# Altium PCB SM3320-BATT-EV.PcbDoc (part 2 of 2)
Units mm, origin at the board's own origin, x right, y up, seen from the top; angles counter-clockwise.
Board outline 204 x 81 mm, 2 copper layers (Top Layer, Bottom Layer), stack 1.662 mm thick; 170 components, 72 nets, 423 pads, 282 vias.
Unrouted connection lines stored in the file: 70.
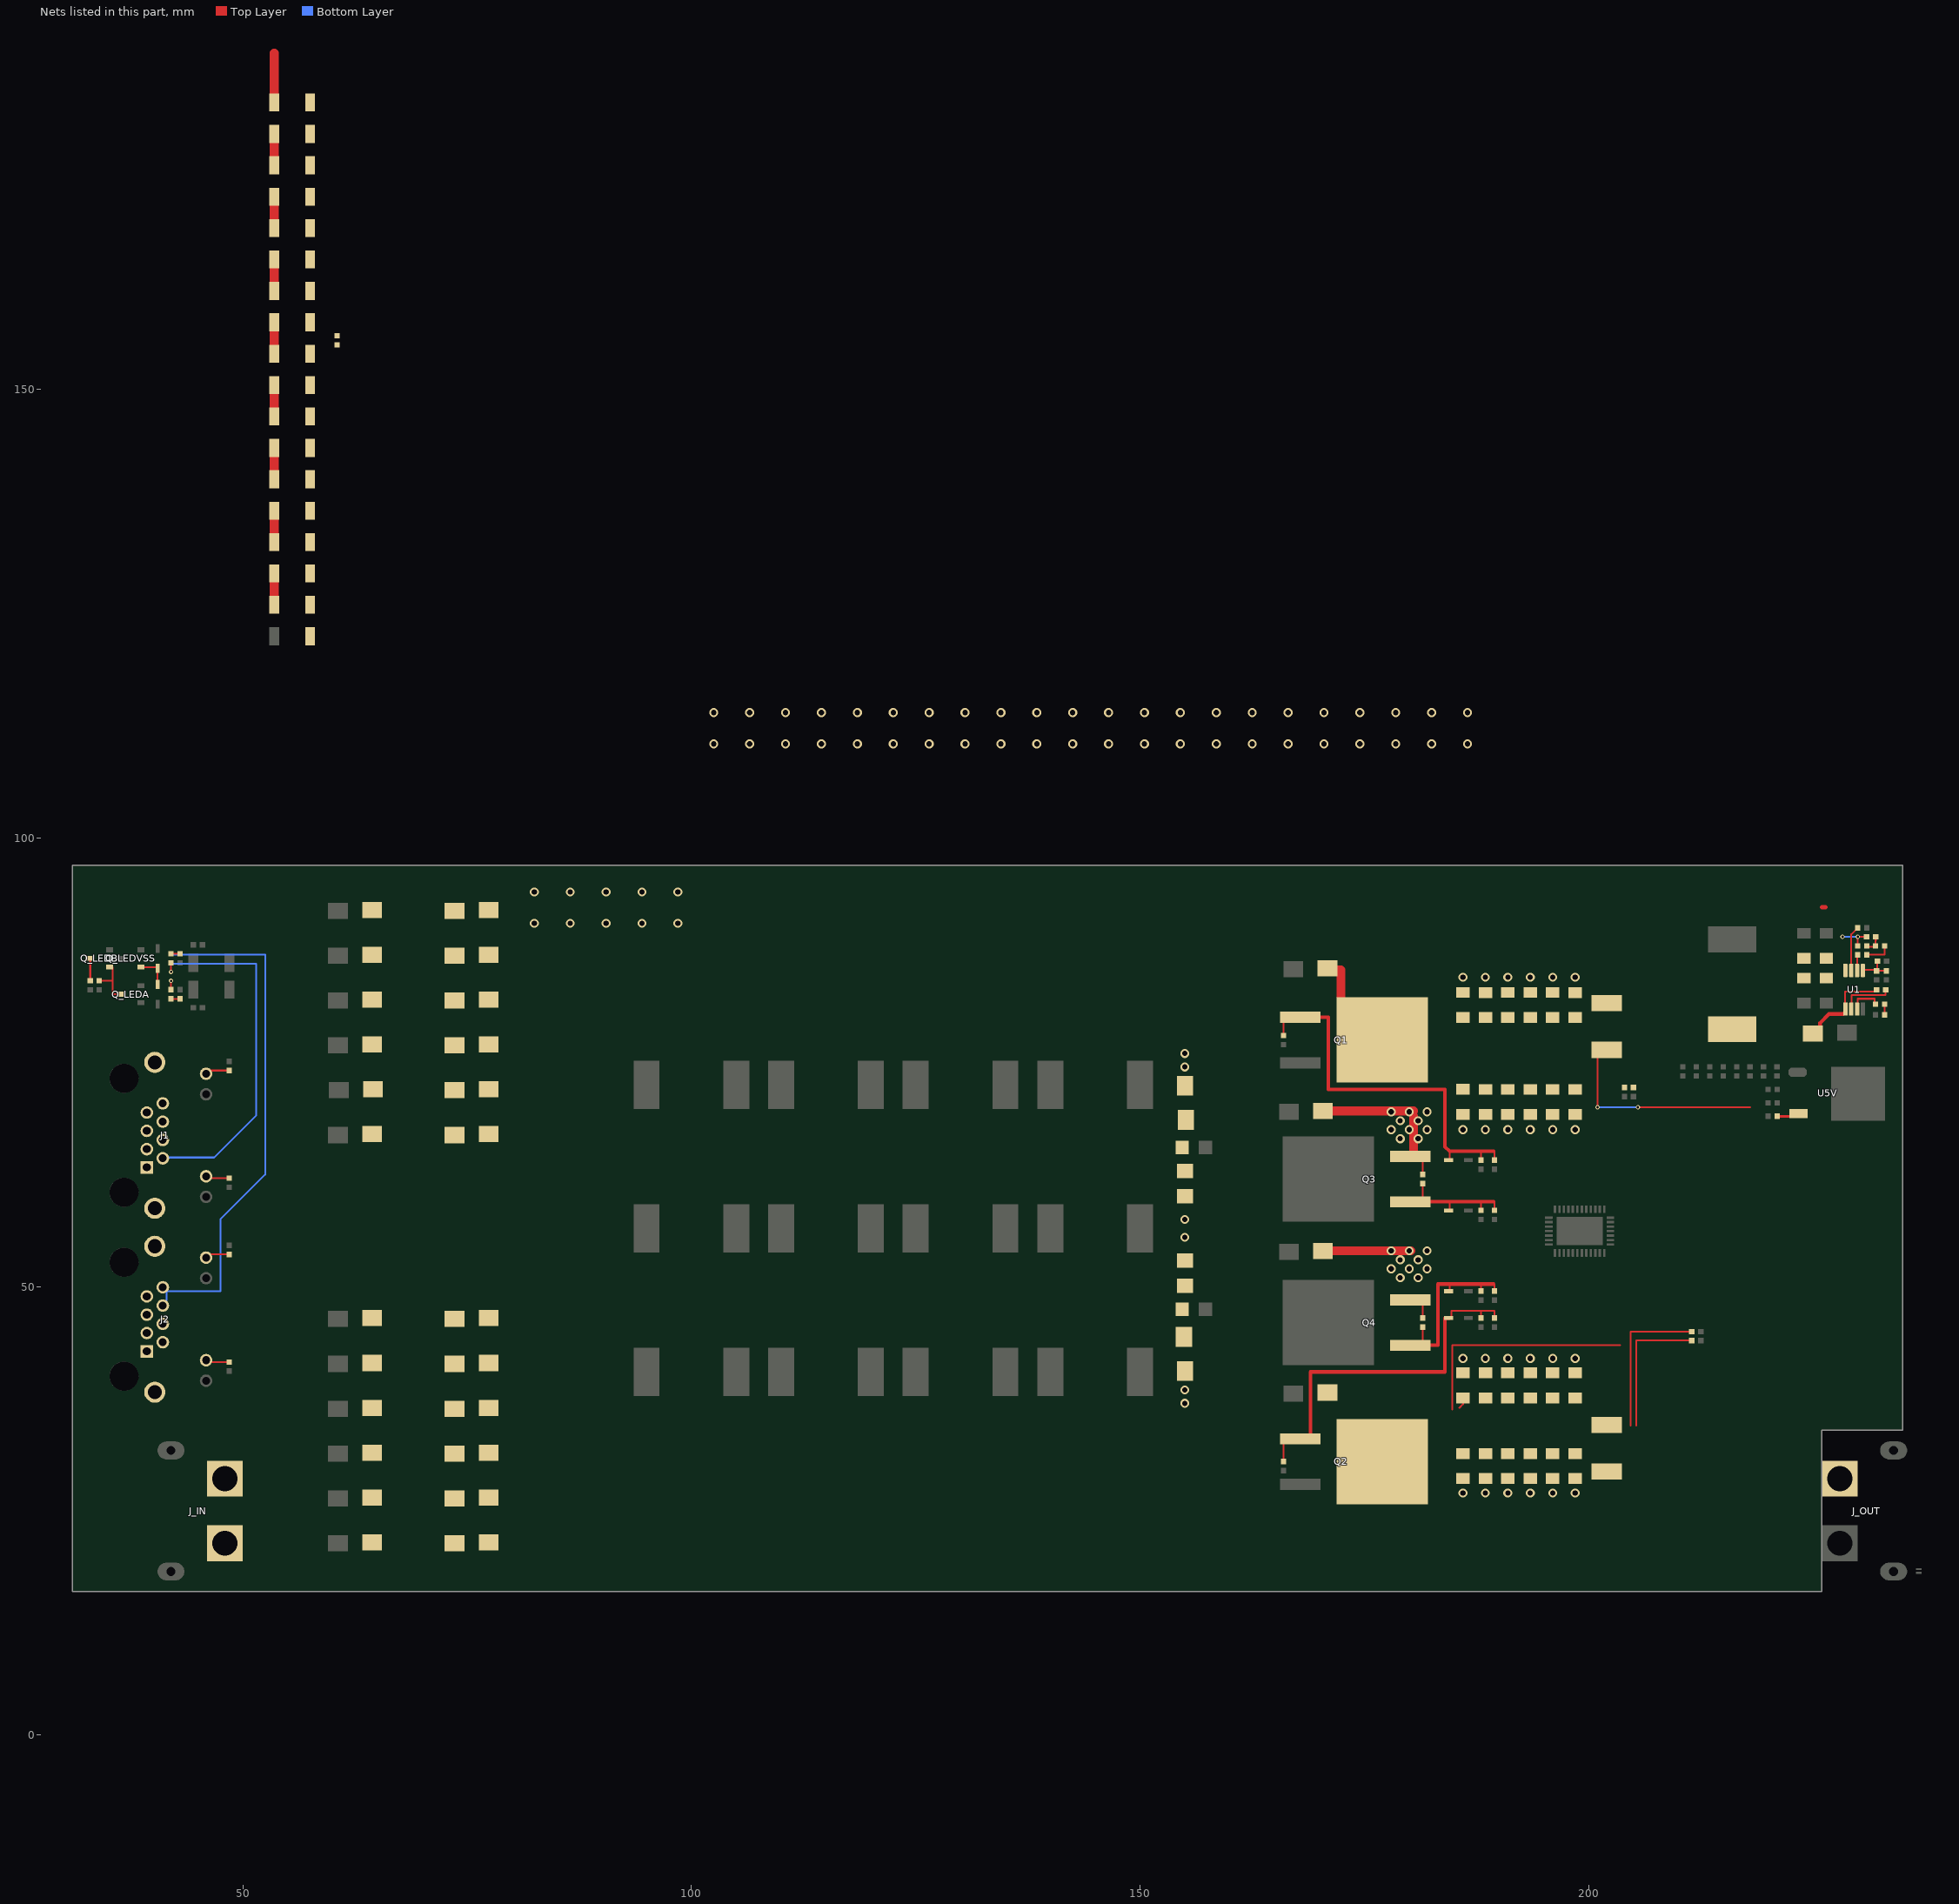
[diagram p2: the nets of this part, all layers, seen from the top]

## Via types
v1: diameter 1, hole 0.6, Top Layer to Bottom Layer, tented both sides, 258 vias
v2: diameter 0.48, hole 0.254, Top Layer to Bottom Layer, tented both sides, 24 vias

## Nets (pads, with @x,y where several pads share a name; then routed paths per layer and width w, separated by ;. In a path a pad name is that pad's centre, name@x,y a point inside that pad or via, vN(x,y) a via of type N, cw(c..) or ccw(c..) an arc to the next point about the centre after c; other vN are vias at no path point) (continued)
NetC15_1: C15.1 U1.7 | length 4.9
  Top Layer w0.2: U1.7@229.275,85.25 229.275,89.275 C15.1@229.9,89.9
NetC17_1: C17.1 U1.2 | length 5.6
  Top Layer w0.2: U1.2@229.3,81.6 229.3,82.5 232.5,82.5 ; 232.908,82.5 232.5,82.5 ; C17.1@233.1,83 233.1,82.5 233.008,82.5 232.5,82.5
NetC17_2: C17.2 D2.1 L0.1 U1.1 | length 9.1
  Top Layer w0.2: U1.1@228.6,80.95 U1.1@228.625,80.95 ; U1.1@228.6,81.4 228.6,82.9 231.792,82.9 C17.2@231.892,83
  Top Layer w0.4: D2.1@225.8,78.6 225.8,79.4 226.8,80.4 228.4,80.4 U1.1@228.5,80.5 ; U1.1@228.6,80.7 U1.1@228.6,80.95
NetC18_1: C18.1 D15.2 R11.2
NetC19_1: C19.1 D14.2 R14.2
NetC24_1: C24.1 R9.2 R15.2 U1.5 | length 3.7
  Top Layer w0.2: U1.5@230.608,85.308 R9.2@232,85.308 ; R9.2@232,85.2 232.008,85.208 R9.2@232.1,85.208 R9.2@232.192,85.208 ; R15.2@232.192,86.3 R9.2@232.192,85.208 ; C24.1@233.2,85.208 R9.2@232.192,85.208
NetD3_2: D3.2 Q1.1 R4.2 R18.2 R18_a.2 | length 46.4
  Top Layer w0.2: R4.2@166,78.008 166,80 Q1.1@166.1,80 ; D3.2@184.5,64.1 184.5,65.1 188,65.1 ; R18_a.2@188,64.108 188,65.1 ; R18.2@189.5,64.108 189.5,65.1 188,65.1
  Top Layer w0.4: Q1.1@167.856,80.04 171,80.04 171,72 184,72 184,65.6 184.5,65.1 188,65.1 189.4,65.1 ; D3.2@184.4,64.1 D3.2@184.5,64.1
NetD4_2: D4.2 Q2.1 R3.1 R19.1 R19_a.1 | length 38.6
  Top Layer w0.2: R3.1@166,30.508 Q2.1@166,32.5 ; D4.2@184.7,46.5 184.7,47.3 188,47.3 ; R19_a.1@188,46.508 188,47.3 ; R19.1@189.5,46.508 189.5,47.3 188,47.3
  Top Layer w0.4: Q2.1@168.5,32.7 Q2.1@168.6,32.7 ; Q2.1@169,32.7 169,40.5 184,40.5 184,46.5 D4.2@184.5,46.5
NetD5_2: D5.2 Q3.1 R22.2 R32.2 R32_a.2 | length 12.7
  Top Layer w0.2: Q3.1@181.5,60 R22.2@181.5,61.492 ; Q3.1@182,59.4 Q3.1@182,59.5 ; D5.2@184.5,58.5 184.5,59.5 ; R32_a.2@188,58.508 188,59.5 ; R32.2@189.5,58.608 189.5,59.5
  Top Layer w0.4: Q3.1@182,59.4 182,59.2 182.3,59.5 184.2,59.5 ; 183.7,59.5 184.5,59.5 188,59.5 189.4,59.5
NetD6_2: D6.2 Q4.1 R23.1 R33.1 R33_a.1 | length 23.7
  Top Layer w0.2: Q4.1@181.5,44 R23.1@181.5,45.492 ; D6.2@184.5,49.5 184.5,50 184.5,50.3 188,50.3 ; R33_a.1@188,49.516 188,50.3 ; R33.1@189.5,49.516 189.5,50.3 188,50.3
  Top Layer w0.4: Q4.1@182.2,43.5 181.8,43.5 183.2,43.5 183.2,50.3 184.5,50.3 188,50.3 189.4,50.3
NetD_CLAMP_1_2: D_CLAMP_1.2 D_CLAMP_2.1 | length 0.5
  Top Layer w0.5: D_CLAMP_2.1@57.5,178 D_CLAMP_2.1@57.5,178.5
NetD_CLAMP_2_2: D_CLAMP_2.2 D_CLAMP_3.1 | length 3.5
  Top Layer w1: D_CLAMP_3.1@53.5,175 D_CLAMP_2.2@53.5,178.5
NetD_CLAMP_3_2: D_CLAMP_3.2 D_CLAMP_4.1 | length 0
NetD_CLAMP_4_2: D_CLAMP_4.2 D_CLAMP_5.1 | length 3.5
  Top Layer w1: D_CLAMP_5.1@53.5,168 D_CLAMP_4.2@53.5,171.5
NetD_CLAMP_5_2: D_CLAMP_5.2 D_CLAMP_6.1
NetD_CLAMP_6_2: D_CLAMP_6.2 D_CLAMP_7.1 | length 3.5
  Top Layer w1: D_CLAMP_7.1@53.5,161 D_CLAMP_6.2@53.5,164.5
NetD_CLAMP_7_2: D_CLAMP_7.2 D_CLAMP_8.1 R16.2
NetD_CLAMP_8_2: D_CLAMP_8.2 D_CLAMP_9.1 | length 4
  Top Layer w0.5: D_CLAMP_8.2@53.5,157.5 D_CLAMP_8.2@53.5,158
  Top Layer w1: D_CLAMP_9.1@53.5,154 D_CLAMP_8.2@53.5,157.5
NetD_CLAMP_9_2: D_CLAMP_9.2 D_CLAMP_10.1 R16.1
NetD_CLAMP_10_2: D_CLAMP_10.2 D_CLAMP_11.1 | length 3
  Top Layer w1: D_CLAMP_11.1@53.5,147 D_CLAMP_10.2@53.5,150
NetD_CLAMP_11_2: D_CLAMP_11.2 D_CLAMP_12.1
NetD_CLAMP_12_2: D_CLAMP_12.2 D_CLAMP_13.1 | length 3.5
  Top Layer w1: D_CLAMP_13.1@53.5,140 D_CLAMP_12.2@53.5,143.5
NetD_CLAMP_13_2: D_CLAMP_13.2 D_CLAMP_14.1
NetD_CLAMP_14_2: D_CLAMP_14.2 D_CLAMP_15.1 | length 3
  Top Layer w1: D_CLAMP_15.1@53.5,133 D_CLAMP_14.2@53.5,136
NetD_CLAMP_15_2: D_CLAMP_15.2 D_CLAMP_16.1
NetD_CLAMP_16_2: D_CLAMP_16.2 D_CLAMP_17.1 | length 3
  Top Layer w1: D_CLAMP_17.1@53.5,126 D_CLAMP_16.2@53.5,129
NetD_CLAMP_17_2: D_CLAMP_17.2 D_CLAMP_18.1
NetJ1_10: J1.10 R101.2 | length 2.5
  Top Layer w0.2: J1.10@46,62.1 R101.2@48.5,62.1
NetJ1_12: J1.12 R100.2 | length 2.5
  Top Layer w0.2: J1.12@46,74.1 R100.2@48.5,74.1
NetJ1_S1: J1.S1 J1.S2
NetJ2_10: J2.10 R102.2 | length 2.5
  Top Layer w0.2: J2.10@46,41.6 R102.2@48.5,41.6
NetJ2_12: J2.12 R103.2 | length 2.5
  Top Layer w0.2: J2.12@46,53.6 R103.2@48.5,53.6
NetJ2_S1: J2.S1 J2.S2
NetQ_LEDA_3: Q_LEDA.3 Q_LEDB.1 R_LEDB_O.1 | length 5.8
  Top Layer w0.2: R_LEDB_O.1@34,84.1 35.5,84.1 ; Q_LEDB.1@35,85.6 35.5,85.6 35.5,84.1 ; Q_LEDA.3@36.35,82.6 35.5,82.6 35.5,84.1
NetQ_LEDB_3: Q_LEDB.3 R_LEDA_O.1 | length 2.5
  Top Layer w0.2: R_LEDA_O.1@33,84.108 Q_LEDB.3@33,86.6
NetR5_1: R5.1 R5_a.2 | length 1.5
  Top Layer w0.2: R5_a.2@233,80.1 232.908,80.1 R5_a.2@233.008,80.3 R5.1@233.008,81.5
NetR5_2: R5.2 U1.3 | length 3.3
  Top Layer w0.2: U1.3@230,81.3 230,82.1 231.892,82.1 231.892,81.5 R5.2@231.9,81.5
NetR17_1: R17.1 U5V.3 | length 2.5
  Top Layer w0.3: R17.1@221.008,69 U5V.3@223.5,69
NetR_1A_a_2: R_1A_a.2 R_1A_b.1 | length 1
  Top Layer w0.2: R_1A_a.2@42,82.1 42.008,82.092 R_1A_b.1@43,82.092
NetR_1B_a_2: R_1B_a.2 R_1B_b.1 | length 1.1
  Top Layer w0.2: R_1B_a.2@42,87.108 R_1B_b.1@43,87.108 43.092,87.108 R_1B_b.1@43.1,87.1
NetRon_a_1: Ron_a.1 Ron_b.1 | length 3
  Top Layer w0.2: Ron_a.1@230.9,86.9 Ron_a.1@230.908,86.892 ; Ron_a.1@230.908,86.9 Ron_a.1@231.008,87 233,87 233,87.8 Ron_b.1@233.1,87.8
NetRon_a_2: Ron_a.2 U1.6 | length 1.7
  Top Layer w0.2: U1.6@229.925,85.15 Ron_a.2@229.925,86.825
NetRon_b_2: Ron_b.2 Ron_c.2 Ron_d.2 | length 2.2
  Top Layer w0.2: Ron_c.2@230.808,87.9 230.908,87.9 Ron_b.2@232,87.9 ; Ron_b.2@231.992,88 Ron_d.2@232,89
PAN_DET: D_1A.1 D_1B.1 Q_LEDVSS.1 | length 3.8
  Top Layer w0.2: Q_LEDVSS.1@38.65,85.65 38.65,85.6 D_1B.1@40.5,85.6 ; D_1A.1@40.5,83.6 D_1A.1@40.5,83.7 D_1B.1@40.5,85.5
PGND: C1.1 C4.1 C5.1 C6.1 C7.1 C8.1 C9.1 C10.1 C11.1 C12.1 C13.1 C16.1 C20.1 C25.1 C27.1 C28.1 C30.1 C36.1 C41.1 C44.1 C45.1 C47.1 C70.1 C72.1 D9.2 D12.2 D14.1 D15.1 Q3.3 Q4.3 R11.1 R14.1 R22.1 R23.2 | length 26.9
  Top Layer w0.2: Q4.3@181.4,48.4 Q4.3@181.4,48.508 ; R23.2@181.5,46.508 Q4.3@181.5,48.5 ; R22.1@181.5,62.508 Q3.3@181.5,64
  Top Layer w1: D9.2@170.4,54 v1(178,54) v1(180,54) v1@180.2,54 ; 171.5,69.6 180.5,69.6 ; Q3.3@180.5,64.5 180.5,69
  other v1: 186,27 188.5,27 191,27 193.5,27 196,27 198.5,27 155,37 155,38.5 186,42 188.5,42 191,42 193.5,42 196,42 198.5,42 179,51 181,51 178,52 180,52 182,52 179,53 181,53 182,54 155,55.5 155,57.5 179,66.5 181,66.5 178,67.5 180,67.5 182,67.5 186,67.5 188.5,67.5 191,67.5 193.5,67.5 196,67.5 198.5,67.5 179,68.5 181,68.5 178,69.5 180,69.5 182,69.5 155,74.5 155,76 186,84.5 188.5,84.5 191,84.5 193.5,84.5 196,84.5 198.5,84.5
SOL_1A: D1_a.2 D1_b.2 D1_c.2 D1_d.2 D1_e.2 D1_f.2 D3_a.1 D3_b.1 D3_c.1 D3_d.1 D3_e.1 D3_f.1 J1.1 J1.2 J1.3 J1.4 J1.5 J1.6 J1.7 J1.8 J_IN.PLUS R_1A_a.1 | length 39.4
  Top Layer w0.2: R_1A_a.1@42,83.116 v2(42,84.1)
  Bottom Layer w0.2: J1.2@41.4,64.4 46.8,64.4 51.5,69.1 51.5,86 42,86
SOL_1B: D2_a.2 D2_b.2 D2_c.2 D2_d.2 D2_e.2 D2_f.2 D4_a.1 D4_b.1 D4_c.1 D4_d.1 D4_e.1 D4_f.1 J2.1 J2.2 J2.3 J2.4 J2.5 J2.6 J2.7 J2.8 J_IN.MINUS R_1B_a.1 | length 58.1
  Top Layer w0.2: v2(42,85.1) R_1B_a.1@42,86.092 R_1B_a.1@42,86.1
  Bottom Layer w0.2: 41.5,48.5 41.5,49.5 47.5,49.5 47.5,57.5 52.5,62.5 52.5,87 42,87
VIN_N: C4.2 C5.2 C6.2 C7.2 C8.2 C9.2 C10.2 C11.2 C12.2 C13.2 C70.2 C72.2 D13.1 Q1.2 R1.1 RB1_P.1 | length 27
  Top Layer w0.2: v2(201,70) 201,75.5 ; v2(205.5,70) 218,70
  Top Layer w1: D13.1@170.9,85.5 171.1,85.3 172.4,85.3 172.4,82.4
  Bottom Layer w0.2: v2(201,70) v2(205.5,70)
VIN_P: C21.2 C22.2 C26.2 C64.2 D1_a.1 D1_b.1 D1_c.1 D1_d.1 D1_e.1 D1_f.1 D2_a.1 D2_b.1 D2_c.1 D2_d.1 D2_e.1 D2_f.1 D_CLAMP_1.1 R1.2 RB1_N.1 Ron_c.1 Ron_d.1 U1.8 | length 10
  Top Layer w0.2: Ron_c.1@229.892,88 229.943,88.05 229.99,88.095 229.994,88.5 v2(230,89) 231.091,89 Ron_d.1@231.091,88.9 ; Ron_d.1@231.091,88.8 Ron_d.1@231.093,88.999
  Top Layer w0.5: 226,92.3 226.4,92.3
  Top Layer w1: D_CLAMP_1.1@53.5,182 53.5,187.5
  Bottom Layer w0.2: v2(228.3,89) v2(230,89)
  other v1: 82.5,90.5 86.5,90.5 90.5,90.5 94.5,90.5 98.5,90.5 82.5,94 86.5,94 90.5,94 94.5,94 98.5,94 102.5,110.5 106.5,110.5 110.5,110.5 114.5,110.5 118.5,110.5 122.5,110.5 126.5,110.5 130.5,110.5 134.5,110.5 138.5,110.5 142.5,110.5 146.5,110.5 150.5,110.5 154.5,110.5 158.5,110.5 162.5,110.5 166.5,110.5 170.5,110.5 174.5,110.5 178.5,110.5 182.5,110.5 186.5,110.5 102.5,114 106.5,114 110.5,114 114.5,114 118.5,114 122.5,114 126.5,114 130.5,114 134.5,114 138.5,114 142.5,114 146.5,114 150.5,114 154.5,114 158.5,114 162.5,114 166.5,114 170.5,114 174.5,114 178.5,114 182.5,114 186.5,114
VOUT_N: J_OUT.PLUS R10.2 RA1_N.1 | length 15.7
  Top Layer w0.2: 205.3,34.5 205.3,44 RA1_N.1@211.492,44 RA1_N.1@211.5,44
VOUT_P: C1.2 C16.2 C20.2 C25.2 C27.2 C28.2 C30.2 C36.2 C41.2 C44.2 C45.2 C47.2 D7.1 Q2.2 R10.1 RA1_P.1 | length 44.9
  Top Layer w0.2: 184.8,36.3 184.8,43.5 203.5,43.5 ; 185.6,36.5 186,36.9 C47.2@186,38.005 ; 204.7,34.5 204.7,45 RA1_P.1@211.492,45
pads on no net: J1. J2. J_IN.M J_OUT.M U.1 U.2 U.3 U.4 U.5 U.6 U.7 U.8 U.9 U.10 U.11 U.12 U.13 U.14 U.15 U.16 U.17 U.18 U.19 U.20 U.21 U.22 U.23 U.24 U.25 U.26 U.27 U.28 U.29 U.30 U.31 U.32 U.33 U.34 U.35 U.36 U.37 U.38 U.39
copper on no net: | length 1.8
  Bottom Layer w0.5: 183.4,54.2 185.1,54.2 185.2,54.1
  other v1: 193.5,18 196.5,18 199.5,18 192,19 195,19 198,19 201,19 193.5,20 196.5,20 199.5,20 192,21 195,21 198,21 201,21 193.5,22 196.5,22 199.5,22 192,23 195,23 198,23 201,23 193.5,24 196.5,24 199.5,24 81,124.5 84.5,124.5 81,128 84.5,128 81,131.5 84.5,131.5 81,135 84.5,135 81,139 84.5,139 81,143 84.5,143 81,147 84.5,147 81,150.5 84.5,150.5 81,154 84.5,154

## Polygon pours and split planes (outlines as drawn)
GND on Bottom Layer "Bottom Layer-GND" (solid, pour order 1242): 183.5,66 239.5,66 239.5,43.5 183.5,43.5
GND on Bottom Layer "Bottom Layer-GND 1" (solid, pour order 1246): 239.5,64.5 239.5,96 200,96 200,64.5
no net on Bottom Layer "Bottom Layer-No Net 23" (solid, pour order 1146): 142.432,26.805 156.021,26.805 156.021,50.91 142.483,50.91 142.432,50.96

## Other copper
Top Layer:
  region net VOUT_P: 203.7,33.5 203.7,35.5 198,35.5 198,33.5
  region net VIN_N: 203.7,75.5 203.7,77.5 198,77.5 198,75.5
  rectangle net VIN_N: 174,73 199,79
  region net HS_A: 107,81 100.5,81 100.5,37.5 107,37.5
  region net HS_B: 99.5,75.5 93,75.5 93,32 99.5,32
  region net PGND: 155.5,76 154.5,76 154.5,72 155.5,72
  rectangle net PGND: 154.5,37 155.5,41
  rectangle net NetC19_1: 154.5,43.5 155.5,50.5
  rectangle net NetC18_1: 154.5,62.5 155.5,69.5
  rectangle net PGND: 154.5,53 155.5,60
  region net HS_A: 152.5,81 146,81 146,37.5 152.5,37.5
  rectangle net HS_B: 138.5,32 145,75.5
  rectangle net HS_B: 123.5,32 130,75.5
  region net HS_A: 122,80.5 115.5,80.5 115.5,37.5 122,37.5
  region net HS_B: 114.5,75.5 108,75.5 108,32 114.5,32
  region net HS_A: 137.5,81 131,81 131,37.5 137.5,37.5
  rectangle net NetD_CLAMP_1_2: 58.5,177.5 62.5,183
  rectangle net NetD_CLAMP_3_2: 58.5,170.5 62.5,176
  rectangle net NetD_CLAMP_5_2: 58.5,163.5 62.5,169
  rectangle net NetD_CLAMP_7_2: 58.5,156.5 62.5,162
  rectangle net NetD_CLAMP_9_2: 58.5,149.5 62.5,155
  rectangle net NetD_CLAMP_11_2: 58.5,142.5 62.5,148
  rectangle net NetD_CLAMP_13_2: 58.5,135.5 62.5,141
  rectangle net NetD_CLAMP_15_2: 58.5,128.5 62.5,134
  rectangle net NetD_CLAMP_17_2: 58.5,121.5 62.5,127
  rectangle net HS_B: 79,17 167.5,25.5
  rectangle net SOL_1B: 38.5,42.1 42,50.6
  rectangle net SOL_1B: 38.5,43.5 53,49
  rectangle net SOL_1B: 50,43.5 55,56
  rectangle net SOL_1B: 50,49 72,56
  rectangle net GND_IN: 56,65.3 59,93.7
  rectangle net GND_IN: 56,19.8 59,48.2
  rectangle net SOL_1A: 50,57.5 55,69.5
  rectangle net SOL_1A: 50,57.5 72,64.5
  region: 191,-4.5 191,2.5 126.5,2.5 126.5,-4.5
  region net HS_A: 181,6.1 181,13 121,13 121,6.1
  rectangle net VIN_N: 171.9,81.5 182,86.4
  rectangle net VIN_P: 227.9,84.5 228.8,92.7
  region net GND: 226,82 222,82 222,81 226,81
  region net GND: 227,89 227,91 226,91 226,89
  region net GND: 224.5,89 224.5,91 223.5,91 223.5,89
  region net VIN_P: 228.5,85.8 224,85.8 224,85.2 228.5,85.2
  region net VIN_P: 227,84.5 227,86.5 226,86.5 226,84.5
  region net VIN_P: 224.5,84.5 224.5,86.5 223.5,86.5 223.5,84.5
  rectangle net GND: 227,72 233,79.5
  region net VIN_P: 228.8,96 210,96 210,92 228.8,92
  rectangle net VIN_P: 200.5,81 203.5,96
  region net PGND: 199,85.5 185.5,85.5 185.5,84 199,84
  rectangle net PGND: 185.5,66.5 199,68
  region net PGND: 199,26 199,27.5 185.5,27.5 185.5,26
  rectangle net GND: 229.4,77.4 233,79.5
  rectangle net 10VDC: 210,76.5 212.7,90.4
  region net NetC17_2: 226.1,77.4 226.1,80 214.3,80 214.3,77.4
  rectangle net 10VDC: 210,86.5 222.5,90.5
  rectangle net GND: 230.4,77.4 231.4,81.7
  region net 10VDC: 223,75.5 223,76.8 210,76.8 210,75.5
  rectangle net PGND: 169.3,68.1 182.5,70.1
  rectangle net PGND: 177.3,63 182.5,70
  rectangle net PGND: 169.3,52.5 182,54.5
  rectangle net PGND: 177.3,47 182.5,54.5
  rectangle net VOUT_P: 171.9,34 182,39.1
  rectangle net VOUT_N: 210.5,25 230.5,32
  rectangle net NetD_CLAMP_1_2: 57.5,178 59,179
  rectangle net NetD_CLAMP_1_2: 57.5,181.5 59,182.5
  rectangle net NetD_CLAMP_3_2: 57.5,171 59,172
  rectangle net NetD_CLAMP_3_2: 57.5,174.5 59,175.5
  rectangle net NetD_CLAMP_5_2: 57.5,164 59,165
  rectangle net NetD_CLAMP_5_2: 57.5,167.5 59,168.5
  rectangle net NetD_CLAMP_7_2: 57.5,157 59,158
  rectangle net NetD_CLAMP_7_2: 57.5,160.5 59,161.5
  rectangle net NetD_CLAMP_9_2: 57.5,150 59,151
  rectangle net NetD_CLAMP_9_2: 57.5,153.5 59,154.5
  rectangle net NetD_CLAMP_11_2: 57.5,143 59,144
  rectangle net NetD_CLAMP_11_2: 57.5,146.5 59,147.5
  rectangle net NetD_CLAMP_13_2: 57.5,136 59,137
  rectangle net NetD_CLAMP_13_2: 57.5,139.5 59,140.5
  rectangle net NetD_CLAMP_15_2: 57.5,129 59,130
  rectangle net NetD_CLAMP_15_2: 57.5,132.5 59,133.5
  rectangle net NetD_CLAMP_17_2: 57.5,125.5 59,126.5
  rectangle net NetD_CLAMP_17_2: 57.5,122 59,123
  rectangle net HS_B: 157,27 165,56
  rectangle net SOL_1A: 39.5,64 55,69.5
  rectangle net SOL_1A: 38.5,62.6 42,71.1
  region net SOL_1B: 73.5,21 73.5,22 71.5,22 71.5,21
  region net VIN_P: 79.5,21 79.5,22 77.5,22 77.5,21
  region net VIN_P: 78,92.5 78,91.5 80,91.5 80,92.5
  region net SOL_1A: 71,92.5 71,91.5 73,91.5 73,92.5
  region net SOL_1A: 66.5,91.5 66.5,92.5 64.5,92.5 64.5,91.5
  region net SOL_1B: 65,22 65,21 67,21 67,22
  region net GND_IN: 60,91.5 60,92.5 58,92.5 58,91.5
  region net GND_IN: 58.5,22 58.5,21 60.5,21 60.5,22
  region net SOL_1B: 72,20 72,56 66,56 66,20
  region net GND_IN: 148.5,-14 148.5,-6.5 121,-6.5 121,-14
  region net GND_IN: 58.5,27 58.5,26 60.5,26 60.5,27
  region net GND_IN: 58.5,32 58.5,31 60.5,31 60.5,32
  region net GND_IN: 58.5,37 58.5,36 60.5,36 60.5,37
  region net GND_IN: 58.5,42 58.5,41 60.5,41 60.5,42
  region net GND_IN: 58.5,47 58.5,46 60.5,46 60.5,47
  region net SOL_1A: 67,81.5 67,82.5 65,82.5 65,81.5
  region net SOL_1A: 67,86.5 67,87.5 65,87.5 65,86.5
  region net GND_IN: 60,86.5 60,87.5 58,87.5 58,86.5
  region net GND_IN: 60,81.5 60,82.5 58,82.5 58,81.5
  region net GND_IN: 60,76.5 60,77.5 58,77.5 58,76.5
  region net GND_IN: 60,66.5 60,67.5 58,67.5 58,66.5
  region net GND_IN: 60,71.5 60,72.5 58,72.5 58,71.5
  region net SOL_1A: 67,76.5 67,77.5 65,77.5 65,76.5
  region net SOL_1A: 67,71.5 67,72.5 65,72.5 65,71.5
  region net SOL_1A: 67,66.5 67,67.5 65,67.5 65,66.5
  region net SOL_1A: 71,87.5 71,86.5 73,86.5 73,87.5
  region net SOL_1A: 71,82.5 71,81.5 73,81.5 73,82.5
  region net SOL_1A: 71,77.5 71,76.5 73,76.5 73,77.5
  region net SOL_1A: 71,72.5 71,71.5 73,71.5 73,72.5
  region net SOL_1A: 71,67.5 71,66.5 73,66.5 73,67.5
  region net VIN_P: 78,67.5 78,66.5 80,66.5 80,67.5
  region net VIN_P: 78,72.5 78,71.5 80,71.5 80,72.5
  region net VIN_P: 78,77.5 78,76.5 80,76.5 80,77.5
  region net VIN_P: 78,82.5 78,81.5 80,81.5 80,82.5
  region net VIN_P: 78,87.5 78,86.5 80,86.5 80,87.5
  region net VIN_P: 80,26 80,27 78,27 78,26
  region net SOL_1B: 73,26 73,27 71,27 71,26
  region net SOL_1B: 73,36 73,37 71,37 71,36
  region net SOL_1B: 73,31 73,32 71,32 71,31
  region net VIN_P: 80,31 80,32 78,32 78,31
  region net VIN_P: 80,36 80,37 78,37 78,36
  region net VIN_P: 80,41 80,42 78,42 78,41
  region net VIN_P: 80,46 80,47 78,47 78,46
  region net SOL_1B: 73,41 73,42 71,42 71,41
  region net SOL_1B: 73,46 73,47 71,47 71,46
  region net SOL_1B: 65,47 65,46 67,46 67,47
  region net SOL_1B: 65,42 65,41 67,41 67,42
  region net SOL_1B: 65,37 65,36 67,36 67,37
  region net SOL_1B: 65,32 65,31 67,31 67,32
  region net SOL_1B: 65,27 65,26 67,26 67,27
  rectangle net SOL_1A: 66,57.5 72,93
  region net GND_IN: 119,-2.5 119,3.5 56,3.5 56,-2.5
  rectangle net VIN_P: 79,20 86.5,96
  rectangle net PGND: 185.5,82.6 186.5,84.6
  region net PGND: 199,69.4 198,69.4 198,67.4 199,67.4
  rectangle net PGND: 198,82.6 199,84.6
  rectangle net PGND: 195.5,82.6 196.5,84.6
  rectangle net PGND: 193,82.6 194,84.6
  rectangle net PGND: 190.5,82.6 191.5,84.6
  rectangle net PGND: 188,82.6 189,84.6
  region net PGND: 191.5,69.4 190.5,69.4 190.5,67.4 191.5,67.4
  region net PGND: 194,69.4 193,69.4 193,67.4 194,67.4
  region net PGND: 196.5,69.4 195.5,69.4 195.5,67.4 196.5,67.4
  region net PGND: 189,69.4 188,69.4 188,67.4 189,67.4
  region net PGND: 186.5,69.4 185.5,69.4 185.5,67.4 186.5,67.4
  region net VIN_N: 199,80.1 198,80.1 198,78.1 199,78.1
  region net VIN_N: 196.5,80.1 195.5,80.1 195.5,78.1 196.5,78.1
  region net VIN_N: 194,80.1 193,80.1 193,78.1 194,78.1
  rectangle net VIN_N: 185.5,71.9 186.5,73.9
  rectangle net VIN_N: 188,71.9 189,73.9
  rectangle net VIN_N: 190.5,71.9 191.5,73.9
  rectangle net VIN_N: 193,71.9 194,73.9
  rectangle net VIN_N: 195.5,71.9 196.5,73.9
  rectangle net VIN_N: 198,71.9 199,73.9
  region net VIN_N: 186.5,80.1 185.5,80.1 185.5,78.1 186.5,78.1
  region net VIN_N: 189,80.1 188,80.1 188,78.1 189,78.1
  region net VIN_N: 191.5,80.1 190.5,80.1 190.5,78.1 191.5,78.1
  region net PGND: 191.5,28.8 190.5,28.8 190.5,26.8 191.5,26.8
  region net PGND: 189,28.8 188,28.8 188,26.8 189,26.8
  region net PGND: 186.5,28.8 185.5,28.8 185.5,26.8 186.5,26.8
  rectangle net PGND: 198,40.2 199,42.2
  rectangle net PGND: 195.5,40.2 196.5,42.2
  rectangle net PGND: 193,40.2 194,42.2
  rectangle net PGND: 190.5,40.2 191.5,42.2
  rectangle net PGND: 188,40.2 189,42.2
  rectangle net PGND: 185.5,40.2 186.5,42.2
  region net PGND: 194,28.8 193,28.8 193,26.8 194,26.8
  region net PGND: 196.5,28.8 195.5,28.8 195.5,26.8 196.5,26.8
  region net PGND: 199,28.8 198,28.8 198,26.8 199,26.8
  region net VOUT_P: 194,33.1 193,33.1 193,31.1 194,31.1
  region net VOUT_P: 191.5,33.1 190.5,33.1 190.5,31.1 191.5,31.1
  region net VOUT_P: 189,33.1 188,33.1 188,31.1 189,31.1
  region net VOUT_P: 186.5,33.1 185.5,33.1 185.5,31.1 186.5,31.1
  rectangle net VOUT_P: 185.5,35.9 186.5,37.9
  rectangle net VOUT_P: 188,35.9 189,37.9
  rectangle net VOUT_P: 190.5,35.9 191.5,37.9
  rectangle net VOUT_P: 193,35.9 194,37.9
  rectangle net VOUT_P: 195.5,35.9 196.5,37.9
  rectangle net VOUT_P: 198,35.9 199,37.9
  region net VOUT_P: 199,33.1 198,33.1 198,31.1 199,31.1
  region net VOUT_P: 196.5,33.1 195.5,33.1 195.5,31.1 196.5,31.1
  rectangle net PGND: 185.5,41.4 199,43
  rectangle net VOUT_P: 174,32.5 199,36.5
  rectangle net HS_A: 157,57.5 165,85
  rectangle net HS_A: 157,57.5 176.2,66.7
  rectangle net VIN_N: 171.9,82.5 182,86.5
  region net VIN_P: 79,96 79,87.5 203.5,87.5 203.5,96
  rectangle net HS_B: 159.5,41.3 176.2,50.8
  region net HS_B: 165,27.5 165,36 93,36 93,27.5
  region net HS_A: 165,77 165,85.5 100.5,85.5 100.5,77
  pour cut-out: 209,28 202,28 202,48 212,48 212,42.5 209,42.5
Bottom Layer:
  rectangle net SOL_1A: 38.5,62.6 42,71.1
  rectangle net GND_OUT: 217,17 230.5,24
  region: 202,25.5 79,25.5 79,17 202,17
  rectangle net PGND: 181,26.5 202,43
  rectangle net VIN_P: 79,88.5 189,96
  rectangle net SOL_1B: 38.5,42.1 42,50.6
  region net PGND: 199,66.5 199,85.5 177,85.5 177,66.5
  region net PGND: 188.8,85.5 79,85.5 79,26.5 188.8,26.5

## Silkscreen, mask and mechanical layers (free items; w line width, h text height)
Top Overlay:
  text "B" at 111.5,126.5 h9
  text "JLCJLCJLCJLC" at 206.6,47.2 h1 r90
Bottom Overlay:
  text "b" at 213.634,97 h70 r90
  text "GND" at 222.1,46.1 h0.8
  text "GND" at 229.7,46.1 h0.8
  text "SDA" at 222.1,43.6 h0.8
  text "SDA" at 229.7,43.6 h0.8
  text "SCL" at 222.1,41 h0.8
  text "SCL" at 229.7,41 h0.8
  text "+3V3" at 229.7,38.6 h0.8
  text "+5V" at 222,38.5 h0.8
  text "DC+" at 215,27 h2
  text "PV_A" at 63.7,26.9 h2
  text "DC-" at 215,20 h2
  text "PV_B" at 63.6,19.7 h2
Mechanical 9:
  drawing of 61 lines, arcs and shapes, not listed
  text "1" at 21.37,152.273 h1.12
  text "2" at 84.76,152.273 h1.12
  text "3" at 147.989,152.273 h1.12
  text "4" at 211.658,152.273 h1.12
  text "5" at 275.133,152.273 h1.12
  text "6" at 338.76,152.273 h1.12
  text "A" at -8.001,123.241 h1.12
  text "A" at 367.919,123.241 h1.12
  text "B" at 367.919,62.789 h1.12
  text "C" at 367.919,2.464 h1.12
  text "PROJECT TITLE:" at 290.703,-52.451 h1.12
  text ".PRJ_Title" at 291.973,-55.499 h1.12
  text "D" at -8.001,-57.734 h1.12
  text "D" at 367.919,-57.734 h1.12
  text "REV:" at 252.857,-59.817 h1.12
  text "PRINT DATE:" at 274.142,-59.817 h1.12
  text "DESIGNED FOR:" at 290.703,-59.817 h1.12
  text ".PCB_MinorRev" at 253.492,-63.754 h1.12
  text ".Print_Date" at 274.193,-63.754 h1.12
  text ".PRJ_Customer" at 291.973,-63.754 h1.12
  text "PADC NUMBER:" at 290.703,-67.691 h1.12
  text "FAB DRAWING NUMBER:" at 329.946,-67.691 h1.12
  text "National Semiconductor and/or its licensors do not warrant the accuracy or completeness of this" at 132.461,-67.742 h1.12
  text "specification or any information contained therein. National and/or its licensors do not warrant that" at 132.461,-70.094 h1.12
  text ".print_Scale" at 253.492,-70.485 h1.12
  text ".PRJ_PADC" at 291.973,-71.247 h1.12
  text "551" at 331.216,-71.247 h1.12
  text ".PRJ_BasePN" at 336.169,-71.247 h1.12
  text "this design will meet the specifications, will be suitable for your application or fit for any particular" at 132.461,-72.446 h1.12
  text "purpose, or will operate in an implementation. National and/or its licensors do not warrant that the" at 132.461,-74.798 h1.12
  text "FILE NAME:" at 252.857,-75.311 h1.12
  text "ALTIUM DESIGNER VERSION:" at 329.946,-75.311 h1.12
  text "design is production worthy. You should completely validate and test your design implementation" at 132.461,-77.15 h1.12
  text ".Pcb_File_Name_No_Path" at 253.492,-78.698 h1.12
  text ".Application_BuildNumber" at 331.216,-79.29 h1.12
  text "to confirm the system functionality for your application." at 132.461,-79.502 h1.12
  text "1" at 21.37,-83.947 h1.12
  text "2" at 84.76,-83.947 h1.12
  text "3" at 147.989,-83.947 h1.12
  text "4" at 211.658,-83.947 h1.12
  text "5" at 275.133,-83.947 h1.12
  text "6" at 338.76,-83.947 h1.12
Mechanical 10:
  drawing of 203 lines, arcs and shapes, not listed
  text "Update the notes below per your unique requirements." at 476.555,121.615 h1.12
  text "In most cases, you should be able to delete or modify lines." at 476.301,117.043 h1.12
  text "NOTES:  UNLESS OTHERWISE SPECIFIED" at 476.682,109.296 h1.12
  text "1. MATERIAL: PER IPC-4101/24" at 476.682,106.102 h1.12
  text "1A. LAMINATE: TYPE GFN, GRADE A, CLASS 2, AND TYPE FR-4" at 476.682,103.501 h1.12
  text "DESIGN INFORMATION" at 317.373,100.863 h1.52
  text "1A. LAMINATE: HIGH-TEMPERATURE FR4" at 478.333,99.715 h1.12
  text "1B. COPPER LAYERS: .0028 +/-.0005 INCH OUTER.   .0028 +/-.0005 INCH INNER LAYERS." at 478.46,97.114 h1.12
  text "(REFER ALSO ARRAY/PANEL PROFILING INFORMATION)" at 308.19,96.756 h1.52
  text "BOARD SIZE" at 290.765,96.647 h1.52
  text "3450MIL" at 302.508,93.4 h1.52
  text "X" at 315.353,93.4 h1.52
  text "5000MIL" at 321.228,93.4 h1.52
  text "1C. ALL COPPER LAYERS MUST BE SPACED PER DETAIL \"A\"." at 478.46,93.328 h1.12
  text "1D. BOARD THICKNESS IS MEASURED INCLUDING TOP AND BOTTOM SIDES FINISHED COPPER. ANY TIN," at 478.587,90.727 h1.12
  text "Number of Layers :" at 301.002,88.392 h1.52
  text "6" at 328.81,88.138 h1.52
  text "TIN/LEAD OR GOLD PLATING, SOLDERMASK AND SILKSCREEN LEGEND MUST NOT BE INCLUDED IN" at 484.556,87.533 h1.12
  text "MIN. TRACK WIDTH:" at 301.002,84.861 h1.52
  text "8" at 328.846,84.861 h1.52
  text "MIL" at 332.777,84.861 h1.52
  text "FINISHED BOARD THICKNESS." at 486.588,83.747 h1.12
  text "MIN. CLEARANCE:" at 301.002,81.509 h1.52
  text "8" at 328.846,81.509 h1.52
  text "MIL" at 332.777,81.509 h1.52
  text "1E. ALL INNER LAYERS MUST BE OXIDE COATED." at 480.619,80.553 h1.12
  text "MIN. VIA PAD SIZE:" at 301.002,78.156 h1.52
  text "24" at 328.084,78.156 h1.52
  text "MIL" at 332.777,78.156 h1.52
  text "2. ALL CONDUCTOR LAYERS MUST BE REGISTERED WITHIN +/- .005 INCH FROM TRUE POSITION." at 476.682,77.359 h1.12
  text "0.05mm (2MIL)" at 318.655,74.556 h1.52
  text "MINIMUM ANNULAR RING" at 292.639,74.448 h1.52
  text "EXTERNAL" at 336.638,74.448 h1.52
  text "3. ETCH TOLERANCES:" at 476.682,74.166 h1.12
  text "PER" at 297.719,71.45 h1.52
  text "IPC-D-275 CLASS 2 LEVEL C" at 303.307,71.45 h1.52
  text "3A. ALL EXTERNAL LAYERS CONDUCTOR WIDTH MUST BE WITHIN +/- .0015 INCH OR +/- 15% OF" at 480.619,70.972 h1.12
  text "MIL, HOLES" at 341.108,68.598 h1.52
  text "+/-" at 331.14,68.58 h1.52
  text "+/-" at 352.831,68.58 h1.52
  text "REGISTRATION TOLERANCES:" at 292.639,68.453 h1.52
  text "METAL" at 323.113,68.453 h1.52
  text "5" at 337.749,68.453 h1.52
  text "3" at 358.907,68.453 h1.52
  text "MIL" at 361.86,68.453 h1.52
  text "GERBER DATA, WHICHEVER IS SMALLER." at 487.604,68.371 h1.12
  text "3B. ALL INTERNAL LAYERS CONDUCTOR WIDTH MUST BE WITHIN +/- .0010 INCH OR +/- 15%" at 480.492,64.585 h1.12
  text "MATERIAL:" at 290.74,63.133 h1.52
  text "OF GERBER DATA, WHICHEVER IS SMALLER." at 488.493,61.983 h1.12
  text "FR-4 High Tg" at 315.796,59.568 h1.52
  text "FR-4" at 302.45,59.351 h1.52
  text "X" at 311.898,59.351 h1.52
  text "OTHER" at 339.229,59.351 h1.52
  text "3C. CRITICAL DIMENSIONS FOR THIS DESIGN ARE xxxxxxxxxxxxxxxxxxx" at 480.492,58.197 h1.12
  text "62 MIL (1.6mm) +/-10%" at 309.564,55.218 h1.52
  text "THICKNESS:" at 292.639,55.109 h1.52
  text "X" at 306.309,55.109 h1.52
  text "OTHER" at 342.2,55.109 h1.52
  text "4. DRILL TOLERANCES AND HOLE SIZES ARE FOR FINISHED BOARD:" at 476.682,55.004 h1.12
  text "ALL .004 INCH MICROVIA HOLES ARE +0.001/-0.004 INCH." at 484.429,51.81 h1.12
  text "TOLERANCE:" at 292.639,51.096 h1.52
  text "X" at 313.958,51.096 h1.52
  text "ANSI IPC-6012 TYPE 3 CLASS 2" at 318.706,51.096 h1.52
  text "ALL PLATED THROUGH HOLES TO .080 INCH ARE +/- .003 INCH." at 484.302,48.616 h1.12
  text "OTHER +/-" at 318.705,47.133 h1.52
  text "ALL PLATED THROUGH HOLES OVER .081 INCH ARE +/- .005 INCH." at 484.302,45.423 h1.12
  text "BOW & TWIST:" at 292.639,43.145 h1.52
  text "X" at 313.958,43.145 h1.52
  text "ANSI IPC-6012 TYPE 3 CLASS 2" at 318.706,43.145 h1.52
  text "ALL NON-PLATED THROUGH HOLES ARE +/- .005 INCH." at 484.302,42.229 h1.12
  text "OTHER +/-" at 318.705,39.119 h1.52
  text "5.  ALL HOLES MUST BE REGISTERED WITHIN +/-.003 INCH FROM TRUE POSITION." at 476.682,39.035 h1.12
  text "6.  MINIMUM ANNULAR RING MUST BE .002 INCH." at 476.682,35.842 h1.12
  text "COPPER THICKNESS (FINISHED):" at 290.74,35.678 h1.52
  text "7. PLATING:" at 476.682,32.648 h1.12
  text "1.4MIL (1oz)" at 313.092,31.799 h1.52
  text "2MIL (1.4oz)" at 332.574,31.799 h1.52
  text "2.8MIL (2oz)" at 351.04,31.799 h1.52
  text "OUTER:" at 299.808,31.69 h1.52
  text "X" at 347.98,31.471 h1.52
  text "7A. PER MIL-C-14550, PLATED THROUGH HOLES MUST BE PLATED WITH .0008 MIN. TO" at 480.492,30.047 h1.12
  text "X" at 340.385,27.864 h1.52
  text "1.4MIL (1oz)" at 321.982,27.811 h1.52
  text "2.8MIL (2oz)" at 343.42,27.811 h1.52
  text "INNER SIGNAL:" at 299.808,27.702 h1.52
  text ".0015 INCH MAX. THICK COPPER." at 488.62,26.261 h1.12
  text "DRILLING:" at 290.74,24.172 h1.52
  text "7B. FINISH: IMMERSION GOLD: 2 TO 8 MICROINCHES GOLD OVER 120-240 MICROINCHES" at 480.492,23.067 h1.12
  text "REFERENCE:" at 292.639,21.2 h1.52
  text "X" at 309.104,21.2 h1.52
  text "AS SHOWN" at 313.854,21.2 h1.52
  text "X" at 331.99,21.2 h1.52
  text "NC_DRILL FILES" at 335.469,21.2 h1.52
  text "OF ELECTROLESS NICKEL." at 488.62,19.873 h1.12
  text "PTH MIN COPPER THICKNESS:" at 292.639,17.187 h1.52
  text "X" at 326.935,17.187 h1.52
  text "1MIL" at 330.415,17.187 h1.52
  text "OTHER" at 343.039,17.187 h1.52
  text "8. WARP AND TWIST OF FINISHED BOARDS MUST NOT EXCEED .007 INCH PER INCH." at 476.682,16.68 h1.12
  text "9. SOLDERMASK: PER IPC-SM-840" at 476.682,13.486 h1.12
  text "BOARD FINISH:" at 290.74,13.148 h1.52
  text "9A. SOLDERMASK BOTH TOP AND BOTTOM SIDES." at 480.111,10.292 h1.12
  text "SILKSCREEN:" at 294.683,10.151 h1.52
  text "X" at 318.782,10.151 h1.52
  text "TOP" at 321.982,10.151 h1.52
  text "X" at 331.736,10.151 h1.52
  text "BOTTOM" at 334.961,10.151 h1.52
  text "9B. SOLDERMASK MUST CLEAR ALL LANDS SHOWN ON GERBER SOLDERMASK LAYERS." at 479.984,7.099 h1.12
  text "SILKSCREEN COLOR:" at 294.683,5.909 h1.52
  text "X" at 318.755,5.909 h1.52
  text "WHITE" at 321.982,5.909 h1.52
  text "OTHER" at 334.961,5.909 h1.52
  text "9C. COLOR GREEN AND SOLVENT FREE." at 479.984,3.905 h1.12
  text "SOLDER RESIST COLOR:" at 294.683,1.591 h1.52
  text "9D. LIQUID PHOTO-IMAGEABLE MUST BE .0002 MIN. TO .0008 MAX. INCH THICK MEASURED OVER COPPER PLATING." at 479.984,0.711 h1.12
  text "10. SILKSCREEN TOP AND BOTTOM SIDES USING A GLOSSY WHITE, NONCONDUCTIVE, EPOXY BASED INK." at 476.682,-1.89 h1.12
  text "X" at 309.103,-2.453 h1.52
  text "GREEN" at 312.33,-2.453 h1.52
  text "BLUE" at 327.341,-2.453 h1.52
  text "OTHER" at 341.007,-2.453 h1.52
  text "NO SILKSCREEN ALLOWED ON GOLD AREAS, ON PADS OR IN HOLES." at 484.556,-5.084 h1.12
  text "IMMERSION GOLD (ENIG)" at 317.689,-7.241 h1.52
  text "SURFACE FINISH:" at 290.74,-7.35 h1.52
  text "X" at 312.941,-7.35 h1.52
  text "Pb-FREE HASL" at 348.99,-7.35 h1.52
  text "11. ROUTE BOARD OUTLINE, PER DRAWING DIMENSIONS." at 476.682,-8.277 h1.12
  text "OTHER" at 317.689,-11.338 h1.52
  text "12. VENDOR MUST ENTER VENDOR'S IDENTITY, DATE CODE AND ANY OTHER IDENTIFICATION MARKS ON" at 476.682,-11.471 h1.12
  text "BOTTOM SIDE ETCH (APPROXIMATELY WHERE SHOWN, IF SHOWN)" at 484.429,-14.665 h1.12
  text "ARRAY/PANEL:" at 290.74,-15.884 h1.52
  text "CUT AND TRIM PER MECH LAYER 1" at 317.689,-15.993 h1.52
  text "13. OTHER VENDOR NOMENCLATURE OR MARKINGS SHOULD NOT BE ETCHED OR" at 476.682,-18.451 h1.12
  text "N.C. ROUTE" at 317.689,-19.847 h1.52
  text "X" at 334.936,-19.847 h1.52
  text "V. SCORE" at 339.686,-19.847 h1.52
  text "SILKSCREENED ON BOARD WITHOUT PRIOR PERMISSION." at 484.429,-21.645 h1.12
  text "CERTIFICATION:" at 290.74,-23.326 h1.52
  text "MATERIALS AND WORKMANSHIP FOR ALL PCBS" at 309.155,-23.326 h1.52
  text "14. ALL VENDOR IN-PROCESS MARKINGS, QA STAMPS, ETC. MUST BE PLACED ON THE BOTTOM SIDE OF BOARD." at 476.682,-24.246 h1.12
  text "TO MEET OR EXCEED THE REQUIREMENTS OF:" at 309.155,-25.816 h1.52
  text "15. FINISHED BOARD MUST MEET UL94V-0 RATING AND RoHS COMPLIANCE." at 476.682,-28.032 h1.12
  text "X" at 299.668,-29.283 h1.52
  text "ANSI IPC-A-600F CLASS ->" at 303.199,-29.283 h1.52
  text "X" at 344.831,-29.283 h1.52
  text "2" at 347.852,-29.283 h1.52
  text "1" at 339.851,-29.321 h1.52
  text "3" at 356.844,-29.321 h1.52
  text "16. DOCUMENTATION THAT MUST BE DELIVERED WITH BOARDS:" at 476.682,-31.226 h1.12
  text "X" at 299.72,-33.334 h1.52
  text "UL 94V-0" at 303.199,-33.334 h1.52
  text "X" at 320.345,-33.334 h1.52
  text "RoHS" at 323.824,-33.334 h1.52
  text "OTHER" at 340.191,-33.334 h1.52
  text "PER ORDER" at 350.277,-33.334 h1.52
  text "16A. CROSS SECTION REPORT (SPACING BETWEEN COPPER LAYERS AND COPPER THICKNESS)" at 479.857,-34.419 h1.12
  text "ADDITIONAL REQUIREMENTS:" at 290.74,-36.915 h1.52
  text "16B. ELECTRICAL TEST CERTIFICATION OF COMPLIANCE (ACCORDANCE WITH IPC-ET-652 CLASS II)" at 479.603,-37.613 h1.12
  text "MICROSECTION:" at 292.639,-39.836 h1.52
  text "YES" at 315.645,-39.836 h1.52
  text "16C. RoHS CERTIFICATE OF COMPLIANCE." at 479.476,-40.807 h1.12
  text "REQUIRED" at 337.527,-43.802 h1.52
  text "BARE BOARD ELEC. TEST:" at 292.639,-43.875 h1.52
  text "NONE" at 325.805,-43.875 h1.52
  text "X" at 334.301,-43.875 h1.52
  text "PER ORDER" at 352.564,-43.875 h1.52
  text "16D. MEASUREMENTS OF CRITICAL PAD AND/OR TRACE DIMENSIONS INDICATED ON NOTE 3C" at 479.73,-44 h1.12
  text "16E. IMPEDANCE REPORT (REQUIRED IMPEDANCE TRACES PER NOTE 19)" at 479.73,-47.194 h1.12
  text "MANUFACTURER'S ID/LOGO:" at 292.639,-47.863 h1.52
  text "RAIL" at 329.869,-47.972 h1.52
  text "X" at 339.381,-47.972 h1.52
  text "METAL" at 342.361,-47.972 h1.52
  text "SILK" at 355.358,-47.972 h1.52
  text "17. ALL TOP AND BOTTOM LAYER .0xx TRACES TO BE xx OHM IMPEDANCE." at 476.682,-50.388 h1.12
  text "ALL INTERNAL LAYER .0xx TRACES TO BE xx OHM IMPEDANCE." at 484.937,-53.581 h1.12
  text "TRACE WIDTH AND LAYER SPACING MAY BE CHANGED TO ACCOMMODATE FABRICATION PROCESS BUT" at 484.683,-56.775 h1.12
  text "PRIOR APPROVAL IS REQUIRED BEFORE TRACE WIDTH OR LAYER SPACING CHANGES ARE MADE." at 488.112,-59.969 h1.12
M30 Board Outline:
  lines w0.1: 226,16 31,16 31,97 235,97 ; 236,16 236,34 245,34 245,97

## Text inside footprints (layer, text, board x,y; h text height)
J1: Top Overlay "+" at 43.376,74.64 h1.78 r270; Top Overlay "+" at 43.371,63.194 h1.78 r270; Top Overlay "-" at 43.627,71.963 h1.78 r270; Top Overlay "-" at 43.626,60.398 h1.78 r270
J2: Top Overlay "+" at 43.376,54.14 h1.78 r270; Top Overlay "+" at 43.371,42.694 h1.78 r270; Top Overlay "-" at 43.627,51.463 h1.78 r270; Top Overlay "-" at 43.626,39.898 h1.78 r270